# Altium PCB JacdacConnectorOnly 75.PcbDoc
Units mm, origin at the board's own origin, x right, y up, seen from the top; angles counter-clockwise.
Board outline 12.14 x 6.68 mm, 2 copper layers (Top Layer, Bottom Layer), stack 1.525 mm thick; 1 components, 0 nets, 11 pads, 1 vias.
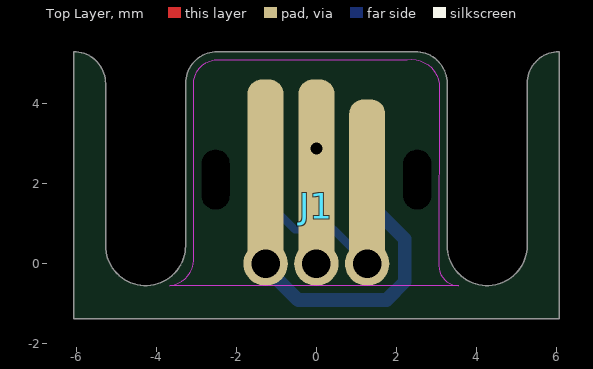
[diagram p0: Top Layer view]
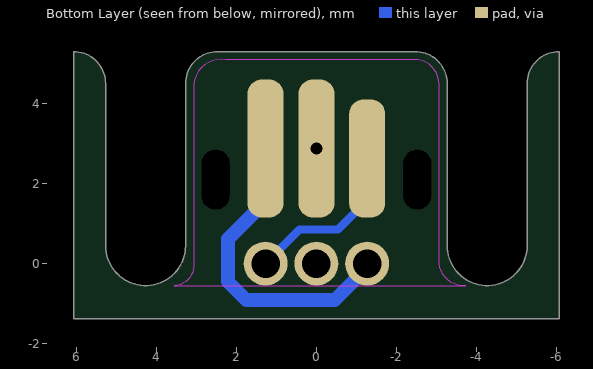
[diagram p1: Bottom Layer view, seen from below]

## Layer stack, top to bottom
Top Solder: solder mask 0.0102, Solder Resist, Dk 3.5
Top Layer: signal copper 0.0356
Dielectric 1: core 1.454, FR-4, Dk 4.2
Bottom Layer: signal copper 0.0356
Bottom Solder: solder mask 0.0102, Solder Resist, Dk 3.5

## Board outline
-6.07,-1.375 -6.07,5.3 cw(c-6.069,4.501) -5.27,4.5 -5.27,0.45 ccw(c-4.27,0.45) -3.27,0.45 -3.27,4.5 cw(c-2.471,4.501) -2.47,5.3 2.47,5.3 cw(c2.471,4.501) 3.27,4.5 3.27,0.45 ccw(c4.27,0.45) 5.27,0.45 5.27,4.5 cw(c6.069,4.501) 6.07,5.3 6.07,-1.375

## Design rules (kind name [scope] priority, off if disabled: settings)
AssemblyTestPointUsage [All] p1: valid=2
BoardOutlineClearance [All] p1: gap=0.3 ignorepadtopadclearanceinfootprint=FALSE except(0: Arc-SplitContinuation Track-SplitContinuation SMDPad-SplitContinuation THPad-SplitContinuation Via-SplitContinuation Fill-SplitContinuation Poly-SplitContinuation Region-OutlineEdge Region-SplitContinuation Text-OutlineEdge Text-SplitContinuation; 0.2: Track-OutlineEdge Fill-CavityEdge Fill-CutoutEdge Fill-SplitBarrior Poly-CavityEdge Poly-CutoutEdge Poly-SplitBarrior Text-CavityEdge Text-CutoutEdge Text-SplitBarrior; 0.25: SMDPad-OutlineEdge)
Clearance [All] p1: gap=0.125 ignorepadtopadclearanceinfootprint=FALSE except(0: Arc-Hole Track-Hole SMDPad-Hole THPad-Hole Via-Hole Fill-Hole Poly-Hole Region-Hole Text-Hole)
ComponentClearance [All] p1: gap=0.1 collisioncheckmode=3 verticalgap=0.254 showdistances=FALSE
DiffPairsRouting [All] p1: maxlimit=2 minlimit=0.15 mostfreqgap=0.15 toplayer_minwidth=0.15 toplayer_maxwidth=2 toplayer_prefwidth=0.15 bottomlayer_minwidth=0.15 bottomlayer_maxwidth=2 bottomlayer_prefwidth=0.15 substack1={CB9D278B-8BF5-444A-AAF4-837A2A9DF42D} toplayer_{cb9d278b-8bf5-444a-aaf4-837a2a9df42d}_minwidth=0.381 toplayer_{cb9d278b-8bf5-444a-aaf4-837a2a9df42d}_maxwidth=0.381 toplayer_{cb9d278b-8bf5-444a-aaf4-837a2a9df42d}_prefwidth=0.381 bottomlayer_{cb9d278b-8bf5-444a-aaf4-837a2a9df42d}_minwidth=0.381 bottomlayer_{cb9d278b-8bf5-444a-aaf4-837a2a9df42d}_maxwidth=0.381 bottomlayer_{cb9d278b-8bf5-444a-aaf4-837a2a9df42d}_prefwidth=0.381 substack2={826B8647-A721-4255-895A-19F9591B9CD1} toplayer_{826b8647-a721-4255-895a-19f9591b9cd1}_minwidth=0.381 toplayer_{826b8647-a721-4255-895a-19f9591b9cd1}_maxwidth=0.381 toplayer_{826b8647-a721-4255-895a-19f9591b9cd1}_prefwidth=0.381 bottomlayer_{826b8647-a721-4255-895a-19f9591b9cd1}_minwidth=0.381 bottomlayer_{826b8647-a721-4255-895a-19f9591b9cd1}_maxwidth=0.381 bottomlayer_{826b8647-a721-4255-895a-19f9591b9cd1}_prefwidth=0.381 substack3={E64FCAF4-1BC8-437D-B1E0-0E5F2DC0F59E} toplayer_{e64fcaf4-1bc8-437d-b1e0-0e5f2dc0f59e}_minwidth=0.381 toplayer_{e64fcaf4-1bc8-437d-b1e0-0e5f2dc0f59e}_maxwidth=0.381 toplayer_{e64fcaf4-1bc8-437d-b1e0-0e5f2dc0f59e}_prefwidth=0.381 bottomlayer_{e64fcaf4-1bc8-437d-b1e0-0e5f2dc0f59e}_minwidth=0.381 bottomlayer_{e64fcaf4-1bc8-437d-b1e0-0e5f2dc0f59e}_maxwidth=0.381 bottomlayer_{e64fcaf4-1bc8-437d-b1e0-0e5f2dc0f59e}_prefwidth=0.381 substack4={E61CE66C-507C-4E1E-8E83-C905434AFC1C} toplayer_{e61ce66c-507c-4e1e-8e83-c905434afc1c}_minwidth=0.381 toplayer_{e61ce66c-507c-4e1e-8e83-c905434afc1c}_maxwidth=0.381 toplayer_{e61ce66c-507c-4e1e-8e83-c905434afc1c}_prefwidth=0.381 bottomlayer_{e61ce66c-507c-4e1e-8e83-c905434afc1c}_minwidth=0.381 bottomlayer_{e61ce66c-507c-4e1e-8e83-c905434afc1c}_maxwidth=0.381 bottomlayer_{e61ce66c-507c-4e1e-8e83-c905434afc1c}_prefwidth=0.381 maxuncoupledlength=25
FabricationTestPointUsage [All] p1: valid=2 allowmultiple=FALSE
HoleSize [All] p1: absolutevalues=TRUE maxlimit=2.54 minlimit=0.2 maxpercent=80.000 minpercent=20.000
MinimumSolderMaskSliver [All] p1: minsoldermaskwidth=0.005
PlaneClearance [All] p1: clearance=0.3
PlaneConnect [All] p1: planeconnectstyle=Relief reliefexpansion=0.5 reliefentries=4 reliefconductorwidth=0.2 reliefairgap=0.3
PolygonConnect "PolygonConnect GND" [isVIA] p1: connectstyle=Relief reliefconductorwidth=0.2 reliefentries=4 polygonreliefangle="90 Angle" airgapwidth=0.2
PolygonConnect [All] p2: connectstyle=Relief reliefconductorwidth=0.2 reliefentries=4 polygonreliefangle="90 Angle" airgapwidth=0.2
RoutingVias [All] p1: holewidth=0.3 width=0.6 viastyle="Through Hole" minholewidth=0.3 minwidth=0.6 maxholewidth=0.5 maxwidth=0.8
SilkToSilkClearance [All] p1: silktosilkclearance=0.001
SilkToSolderMaskClearance [IsPad] p1: minsilkscreentomaskgap=0.05 clearancetoexposedcopper=TRUE
SolderMaskExpansion [All] p1: expansion=0.075 istentingtop=FALSE
Width [All] p1: maxlimit=2 minlimit=0.15 preferedwidth=0.15 substack1={CB9D278B-8BF5-444A-AAF4-837A2A9DF42D} substack2={826B8647-A721-4255-895A-19F9591B9CD1} substack3={E64FCAF4-1BC8-437D-B1E0-0E5F2DC0F59E} substack4={E61CE66C-507C-4E1E-8E83-C905434AFC1C} minimp=50.000000 maximp=50.000000 favimp=50.000000
20 further rules are at their usual default settings.

## Components (designator, comment, footprint, x,y, rotation, side; value= is the part's Value field where it differs from the comment)
J1 "3 pin JACDAC edge connector" JACDAC_EDGE_CONNECTOR_0.2mm_T&G 0,-0.55 r0 top

## Footprints (in the part's own frame and the unit in brackets; to place one, negate y for a bottom-side part, rotate by r counter-clockwise, add the part's x,y. Pads: shape width x height; smd on the part's side, far side on the other; paste and mask are expansions set on the pad)
JACDAC_EDGE_CONNECTOR_0.2mm_T&G [mm] "Jacdac 3 pin connector with traces for 0.2mm T&G"
  rrect78% 0.9x2.95 smd far side paste-1 mask+0: 1(-1.27,3.175)
  round 1.11 / inner round 0.71 / far side round 1.1 hole 0.71 paste-0.254 mask+0: 1(1.27,0.55) 2(0,0.55) 3(-1.27,0.55)
  rrect78% 0.9x4.3 smd paste-1 mask+0: 1(1.27,2.5)
  rrect78% 0.9x4.8 smd paste-1 mask+0: 2(0,2.75) 3(-1.27,2.75)
  rrect78% 0.9x3.45 smd far side paste-1 mask+0: 2(0,3.425) 3(1.27,3.425)
  round 0 hole 0.7 slot 1.5 at 90 deg unplated: ""(-2.52,2.65) ""(2.52,2.65)
  Top Layer keep-out region: -3.663,0 -3.413,0.079 -3.213,0.248 -3.092,0.48 -3.07,0.741 -3.07,0.741 -3.07,5.033 -2.987,5.341 -2.761,5.567 -2.453,5.65 -2.453,5.65 2.27,5.65 2.545,5.635 2.794,5.516 2.978,5.31 3.07,5.05 3.07,5.05 3.061,0.495 3.098,0.306 3.206,0.145 3.366,0.038 3.556,0 3.556,0
  Top Layer keep-out region: -3.663,0 -3.413,0.079 -3.213,0.248 -3.092,0.48 -3.07,0.741 -3.07,0.741 -3.07,5.033 -2.987,5.341 -2.761,5.567 -2.453,5.65 -2.453,5.65 2.27,5.65 2.545,5.635 2.794,5.516 2.978,5.31 3.07,5.05 3.07,5.05 3.061,0.495 3.098,0.306 3.206,0.145 3.366,0.038 3.556,0 3.556,0
  Bottom Layer lines w0.2: -1.307,2.167 -0.54,1.4 0.426,1.4 1.126,0.7 ; -1.27,0.85 -1.126,0.85 ; -1.067,2.077 -1.067,2.153
  Bottom Layer lines w0.34: -1.27,0.454 -0.457,-0.359 1.753,-0.359 2.21,0.098 2.21,1.165 1.283,2.092
  Bottom Layer keep-out region: -3.731,0 -3.494,0.027 -3.285,0.142 -3.136,0.329 -3.07,0.559 -3.07,0.559 -3.07,5.033 -3.023,5.269 -2.889,5.469 -2.689,5.603 -2.453,5.65 -2.453,5.65 2.27,5.65 2.545,5.635 2.794,5.516 2.978,5.31 3.07,5.05 3.07,5.05 3.07,0.487 3.107,0.301 3.213,0.143 3.371,0.037 3.557,0 3.557,0

## Part data
J1: library part "Jacdac edge connector", "3 pin Jacdac edge connector 1.27mm pitch", Manufacturer Part Number=JACDAC_EDGE_CONNECTOR, Checked By=?, ComponentLink1Description="Yuliang JACDAC cable connector drawing online", ComponentLink1URL=https://github.com/microsoft/jacdac-mdk/blob/main/connector/JACDAC-Connector-by-Yuliang-2020-11-28.pdf, ComponentLink2Description="JACDAC PCB edge connector spec onlin", ComponentLink2URL=https://github.com/microsoft/jacdac-mdk/blob/main/connector/JACDAC_PCB_Edge_Connector_Drawing_JD-PEC-01_rev_01.pdf, Created By="D. Gakure", PCB Type="1.6mm FR4"

## Via types
v1: diameter 0.6, hole 0.3, Top Layer to Bottom Layer, tented both sides, 1 vias

## Nets (pads, with @x,y where several pads share a name; then routed paths per layer and width w, separated by ;. In a path a pad name is that pad's centre, name@x,y a point inside that pad or via, vN(x,y) a via of type N, cw(c..) or ccw(c..) an arc to the next point about the centre after c; other vN are vias at no path point)
pads on no net: J1. J1.1 J1.2 J1.3
copper on no net:
  other v1: 0,2.875

## Other copper
Top Layer:
Bottom Layer:

## Silkscreen, mask and mechanical layers (free items; w line width, h text height)
Top Overlay:
Bottom Overlay:
Top Paste:
Bottom Paste:
Top Solder:
Bottom Solder:
Mechanical 1:
  lines w0.013: -5.27,0.9 -5.27,0.45 ccw(c-4.27,0.45) -3.27,0.45 -3.27,4.5 cw(c-2.471,4.501) -2.47,5.3 2.47,5.3 cw(c2.471,4.501) 3.27,4.5 3.27,0.45 ccw(c4.27,0.45) 5.27,0.45 5.27,0.9
Fabrication Notes:
Board Outline:
  the board outline again, w0.2
Top Assy:
  lines w0.05: -5.27,0.45 ccw(c-4.27,0.45) -3.27,0.45 ; -5.27,0.45 ccw(c-4.27,0.45) -3.27,0.45 ; -5.27,0.45 -5.27,0.9 -5.27,0.45 ; -3.27,0.45 -3.27,4.5 ; -3.27,0.45 -3.27,4.5 ; -3.27,4.5 cw(c-2.471,4.501) -2.47,5.3 ; -3.27,4.5 cw(c-2.471,4.501) -2.47,5.3 ; -2.47,5.3 2.47,5.3 ; -2.47,5.3 2.47,5.3 ; 2.47,5.3 cw(c2.471,4.501) 3.27,4.5 ; 2.47,5.3 cw(c2.471,4.501) 3.27,4.5 ; 3.27,0.45 ccw(c4.27,0.45) 5.27,0.45 ; 3.27,0.45 ccw(c4.27,0.45) 5.27,0.45 ; 3.27,0.45 3.27,4.5 ; 3.27,0.45 3.27,4.5 ; 5.27,0.45 5.27,0.9 5.27,0.45
Bottom Assy:
  lines w0.05: -5.27,0.45 ccw(c-4.27,0.45) -3.27,0.45 ; -5.27,0.45 ccw(c-4.27,0.45) -3.27,0.45 ; -5.27,0.45 -5.27,0.9 -5.27,0.45 ; -3.27,0.45 -3.27,4.5 ; -3.27,0.45 -3.27,4.5 ; -3.27,4.5 cw(c-2.471,4.501) -2.47,5.3 ; -3.27,4.5 cw(c-2.471,4.501) -2.47,5.3 ; -2.47,5.3 2.47,5.3 ; -2.47,5.3 2.47,5.3 ; 2.47,5.3 cw(c2.471,4.501) 3.27,4.5 ; 2.47,5.3 cw(c2.471,4.501) 3.27,4.5 ; 3.27,0.45 ccw(c4.27,0.45) 5.27,0.45 ; 3.27,0.45 ccw(c4.27,0.45) 5.27,0.45 ; 3.27,0.45 3.27,4.5 ; 3.27,0.45 3.27,4.5 ; 5.27,0.45 5.27,0.9 5.27,0.45

## Text inside footprints (layer, text, board x,y; h text height)
J1: Mechanical 9 "Jacdac / cable connector  / body" at -4.821,9.458 h1.7; Alignment "board outline  / for 'outie'" at 5.14,0.314 h1.2; Alignment "board outline  / for 'innie'" at 4.53,-2.531 h1.2; Top Courtyard "board outline  / for 'outie'" at 5.14,0.314 h1.2